# Altium PCB PCB1.PcbDoc
Units mil, origin at the board's own origin, x right, y up, seen from the top; angles counter-clockwise.
Board outline 6000 x 4000 mil, 2 copper layers (Top Layer, Bottom Layer); 27 components, 52 nets, 173 pads, 6 vias.
Unrouted connection lines stored in the file: 77.
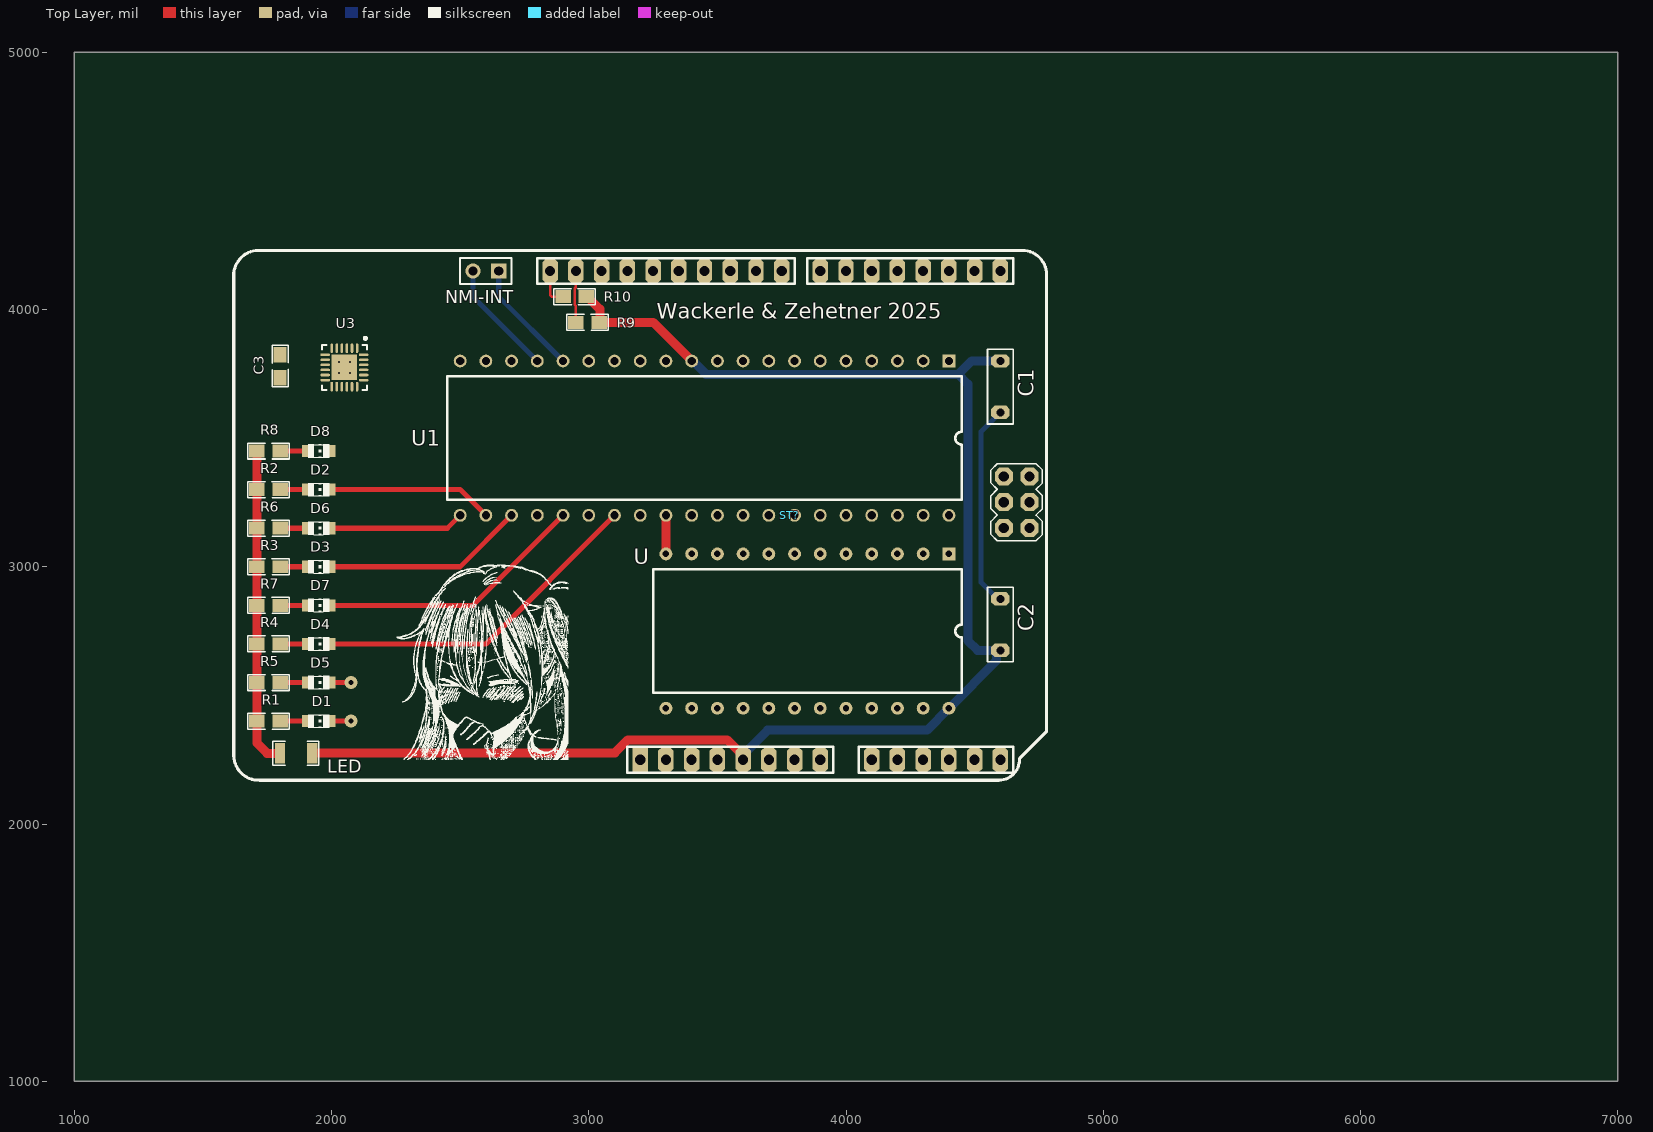
[diagram p0: Top Layer view]
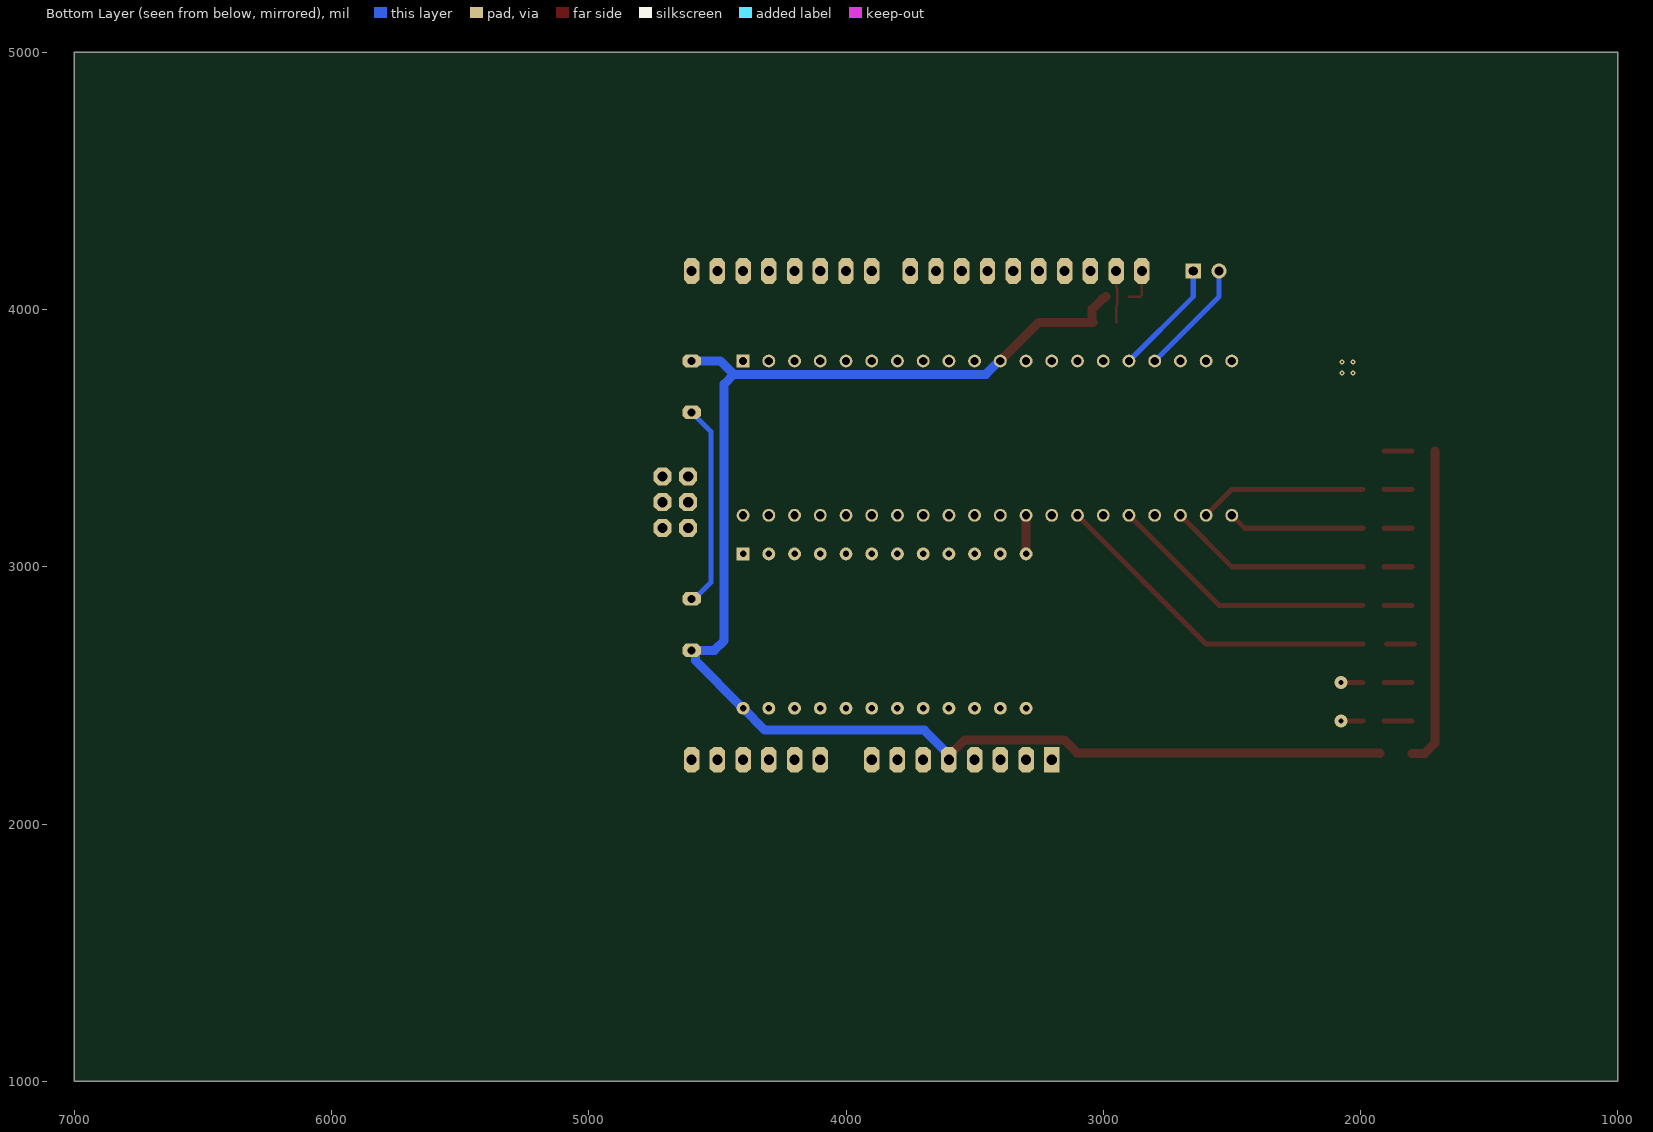
[diagram p1: Bottom Layer view, seen from below]

## Layer stack, top to bottom
Top Solder: solder mask 0.4, Solder Resist, Dk 3.5
Top Layer: signal copper 1.4
Dielectric 1: dielectric 12.6, FR-4, Dk 4.8
Bottom Layer: signal copper 1.4
Bottom Solder: solder mask 0.4, Solder Resist, Dk 3.5

## Board outline
1000,1000 7000,1000 7000,5000 1000,5000

## Design rules (kind name [scope] priority, off if disabled: settings)
Clearance [All] p1: gap=10 ignorepadtopadclearanceinfootprint=FALSE
PolygonConnect [All] p1: connectstyle=Relief reliefconductorwidth=10 reliefentries=4 polygonreliefangle="90 Angle" airgapwidth=10
RoutingVias [All] p1: holewidth=28 width=50 viastyle="Through Hole" minholewidth=28 minwidth=50 maxholewidth=28 maxwidth=50
SolderMaskExpansion [All] p1: expansion=4 istentingtop=FALSE
SupplyNets "Schematic Supply Nets_16" [InNet('SCL')] p1: voltage=0.000
SupplyNets "Schematic Supply Nets_15" [InNet('/HALT')] p2: voltage=0.000
SupplyNets "Schematic Supply Nets_14" [InNet('/CS_RAM')] p3: voltage=0.000
SupplyNets "Schematic Supply Nets_13" [InNet('SDA')] p4: voltage=0.000
SupplyNets "Schematic Supply Nets_12" [InNet('/BUSRQ')] p5: voltage=0.000
SupplyNets "Schematic Supply Nets_11" [InNet('/Read')] p6: voltage=0.000
SupplyNets "Schematic Supply Nets_10" [InNet('5V')] p7: voltage=0.000
SupplyNets "Schematic Supply Nets_9" [InNet('Clock')] p8: voltage=0.000
SupplyNets "Schematic Supply Nets_8" [InNet('/WAIT')] p9: voltage=0.000
SupplyNets "Schematic Supply Nets_7" [InNet('/Write')] p10: voltage=0.000
SupplyNets "Schematic Supply Nets_6" [InNet('/MREQ')] p11: voltage=0.000
SupplyNets "Schematic Supply Nets_5" [InNet('/Reset_Z80')] p12: voltage=0.000
SupplyNets "Schematic Supply Nets_4" [InNet('LED_5V')] p13: voltage=0.000
SupplyNets "Schematic Supply Nets_3" [InNet('/IOREQ')] p14: voltage=0.000
SupplyNets "Schematic Supply Nets_2" [InNet('GND')] p15: voltage=0.000
SupplyNets "Schematic Supply Nets_1" [InNet('/M1')] p16: voltage=0.000
SupplyNets "Schematic Supply Nets" [InNet('/BUSACK')] p17: voltage=0.000
Width [All] p1: maxlimit=100 minlimit=10 preferedwidth=25 minimp=50.000000 maximp=50.000000 favimp=50.000000
30 further rules are at their usual default settings.

## Components (designator, comment, footprint, x,y, rotation, side; value= is the part's Value field where it differs from the comment)
C1 "100nF" C_RM2-025X075 4600,3600 r90 top
C2 "100nF" C_RM2-025X075 4600,2875 r270 top
C3 "100nF" C_SMD_C0805 1800,3735 r90 top
D1 "SMD LED RED" "SMD_0805_CHIP-LED - RED" 1950,2400 r270 top
D2 "SMD LED RED" "SMD_0805_CHIP-LED - RED" 1950,3300 r270 top
D3 "SMD LED GREEN" "SMD_0805_CHIP-LED - GREEN" 1950,3000 r270 top
D4 "SMD LED YELLOW" "SMD_0805_CHIP-LED - YELLOW" 1950,2700 r270 top
D5 "SMD LED RED" "SMD_0805_CHIP-LED - RED" 1950,2550 r270 top
D6 "SMD LED RED" "SMD_0805_CHIP-LED - RED" 1950,3150 r270 top
D7 "SMD LED GREEN" "SMD_0805_CHIP-LED - GREEN" 1950,2850 r270 top
D8 "SMD LED YELLOW" "SMD_0805_CHIP-LED - YELLOW" 1950,3450 r270 top
LED "0R" R_SMD_R1206 1925,2275 r180 top
NMI-INT "Header 2" HDR1X2 2650,4150 r180 top
R1 "200R" R_SMD_R0805 1800,2400 r180 top
R2 "200R" R_SMD_R0805 1800,3300 r180 top
R3 "160R" R_SMD_R0805 1800,3000 r180 top
R4 "160R" R_SMD_R0805 1800,2700 r180 top
R5 "200R" R_SMD_R0805 1800,2550 r180 top
R6 "200R" R_SMD_R0805 1800,3150 r180 top
R7 "160R" R_SMD_R0805 1800,2850 r180 top
R8 "160R" R_SMD_R0805 1800,3450 r180 top
R9 "4k7" R_SMD_R0805 3040,3950 r180 top
R10 "4k7" R_SMD_R0805 2990,4050 r180 top
ST? "Arduino_UNO_R3_Layout" "Arduino UNO Rev3 Layout" 3400,2250 r0 top locked
U "HM6116L" HM6116L 4400,3050 r270 top
U1 "Zilog Z80" Z80 4400,3800 r270 top
U3 "MCP23018" MCP23018 2050,3775 r270 top

## Footprints (in the part's own frame and the unit in brackets; to place one, negate y for a bottom-side part, rotate by r counter-clockwise, add the part's x,y. Pads: shape width x height; smd on the part's side, far side on the other; paste and mask are expansions set on the pad)
"Arduino UNO Rev3 Layout" [mil] "Arduino UNO Rev3 Headers"
  oct 60x100 hole 39.37: 5V(200,0) 33V(100,0) A0(700,0) A1(800,0) A2(900,0) A3(1000,0) A4(1100,0) A5(1200,0) AREF(-350,1900) D0_RX(1200,1900) D1_TX(1100,1900) D2(1000,1900) D3(900,1900) D4(800,1900) D5(700,1900) D6(600,1900) D7(500,1900) D8(350,1900) D9(250,1900) D10(150,1900) D11_MOSI(50,1900) D12_MISO(-50,1900) D13_SCK(-150,1900) GND(-250,1900) GND(300,0) GND(400,0) RESET(0,0) SCL(-550,1900) SDA(-450,1900) VDDIO(-100,0) VIN(500,0)
  oct 70x70 hole 39.37: 5V(1313.41,1100.89) D11_MOSI(1313.41,1000.89) D12_MISO(1213.41,1100.89) D13_SCK(1213.41,1000.89) GND(1313.41,900.89) RESET(1213.41,900.89)
  rect 60x100 hole 39.37: N.C.(-200,0)
  silkscreen extent -1780,-80 1380,1980, body extent -600,-50 1250,1950, height 335
C_RM2-025X075 [mil] "RM2, outline 2.5 x 7.5 mm"
  oct 52x72 hole 31.5: 1(0,0) 2(200,0)
  silkscreen extent -45,-50 245,50
C_SMD_C0805 [mil] "SMD, 0805"
  rect 60x50 smd: 1(0,0) 2(90,0)
  silkscreen extent -36,-31 126,31, body extent 6,-25 84,25, height 31
HDR1X2 [mm] "Connector; Header; 2 Position"
  rect 1.5x1.5 hole 0.9: 1(0,0)
  round 1.5 hole 0.9: 2(2.54,0)
  silkscreen extent -1.27,-1.27 3.81,1.27
HM6116L [mil]
  rect 50x50 hole 25: 1(0,0)
  round 50 hole 25: 2(0,-100) 3(0,-200) 4(0,-300) 5(0,-400) 6(0,-500) 7(0,-600) 8(0,-700) 9(0,-800) 10(0,-900) 11(0,-1000) 12(0,-1100) 13(600,-1100) 14(600,-1000) 15(600,-900) 16(600,-800) 17(600,-700) 18(600,-600) 19(600,-500) 20(600,-400) 21(600,-300) 22(600,-200) 23(600,-100) 24(600,0)
  silkscreen extent 60,-1150 540,50
MCP23018 [mm] "16bit I2C Port expander"
  oval 0.95x0.25 smd: 1(-1.9,1.25) 2(-1.9,0.75) 3(-1.9,0.25) 4(-1.9,-0.25) 5(-1.9,-0.75) 6(-1.9,-1.25) 13(1.9,-1.25) 14(1.9,-0.75) 15(1.9,-0.25) 16(1.9,0.25) 17(1.9,0.75) 18(1.9,1.25)
  oval 0.25x0.95 smd: 7(-1.25,-1.9) 8(-0.75,-1.9) 9(-0.25,-1.9) 10(0.25,-1.9) 11(0.75,-1.9) 12(1.25,-1.9) 19(1.25,1.9) 20(0.75,1.9) 21(0.25,1.9) 22(-0.25,1.9) 23(-0.75,1.9) 24(-1.25,1.9)
  rect 2.5x2.5 smd: 25(0,0)
  silkscreen extent -3,-2.23 2.23,2.22, body extent -2.07,-2.08 2.08,2.07, height 0.8
R_SMD_R0805 [mil] "SMD, 0805"
  rect 60x50 smd: 1(0,0) 2(90,0)
  silkscreen extent -36,-31 126,31, body extent 4,-25 82,25, height 31
R_SMD_R1206 [mm] "SMD, 1206"
  rect 1x2 smd: 1(0,0) 2(3.2,0)
  silkscreen extent -0.66,-1.17 3.89,1.17, body extent 0,-0.8 3.2,0.8, height 1
"SMD_0805_CHIP-LED - GREEN" [mm]
  rect 1.2x1.2 smd: A(0,-1.05) K(0,1.05)
  silkscreen extent -0.68,-1.05 0.68,1.05, body extent -0.63,-1.01 0.62,1.01, height 1.1
"SMD_0805_CHIP-LED - RED" [mm]
  rect 1.2x1.2 smd: A(0,-1.05) K(0,1.05)
  silkscreen extent -0.68,-1.05 0.68,1.05, body extent -0.68,-1.05 0.67,1.05, height 0.9
"SMD_0805_CHIP-LED - YELLOW" [mm]
  rect 1.2x1.2 smd: A(0,-1.05) K(0,1.05)
  silkscreen extent -0.68,-1.05 0.68,1.05, body extent -0.63,-1.01 0.62,1.01, height 1.1
Z80 [mil]
  rect 50x50 hole 32: 1(0,0)
  round 50 hole 32: 2(0,-100) 3(0,-200) 4(0,-300) 5(0,-400) 6(0,-500) 7(0,-600) 8(0,-700) 9(0,-800) 10(0,-900) 11(0,-1000) 12(0,-1100) 13(0,-1200) 14(0,-1300) 15(0,-1400) 16(0,-1500) 17(0,-1600) 18(0,-1700) 19(0,-1800) 20(0,-1900) 21(600,-1900) 22(600,-1800) 23(600,-1700) 24(600,-1600) 25(600,-1500) 26(600,-1400) 27(600,-1300) 28(600,-1200) 29(600,-1100) 30(600,-1000) 31(600,-900) 32(600,-800) 33(600,-700) 34(600,-600) 35(600,-500) 36(600,-400) 37(600,-300) 38(600,-200) 39(600,-100) 40(600,0)
  silkscreen extent 60,-1950 540,50

## Part data
C1 C2: library part C, "Capacitor", Rated Voltage=50V, LatestRevisionDate=07-Sep-2019, Published=21-Feb-2011, Usage="only permitted for non-commercial purposes at HTL I Innsbruck"
C3: library part C_SMD, "SMD Capacitor", Rated Voltage=25V, LatestRevisionDate=07-Sep-2019, Published=21-Feb-2011, Usage="only permitted for non-commercial purposes at HTL I Innsbruck"
D1 D2 D5 D6: library part SMD_LED_RED, "Red GaAs LED (Vf=1.7V, If=40mA)", LatestRevisionDate=21-Jun-2015, Published=29-Mar-2017, SimulationModellSource="Miscellaneous Devices", Usage="only permitted for non-commercial purposes at HTL I Innsbruck"
D3 D7: library part SMD_LED_GREEN, "Green GaAs LED (Vf=2.1V, If=40mA)", LatestRevisionDate=21-Jun-2015, Published=29-Mar-2017, SimulationModellSource="Miscellaneous Devices", Usage="only permitted for non-commercial purposes at HTL I Innsbruck"
D4 D8: library part SMD_LED_YELLOW, "Yellow GaAs LED (Vf=2.1V, If=40mA)", LatestRevisionDate=21-Jun-2015, Published=29-Mar-2017, SimulationModellSource="Miscellaneous Devices", Usage="only permitted for non-commercial purposes at HTL I Innsbruck"
LED R1 R2 R3 R4 R5 R6 R7 R8 R9 R10: library part R_SMD, "SMD Resistor", LatestRevisionDate=07-Sep-2019, Published=21-Feb-2011, Usage="only permitted for non-commercial purposes at HTL I Innsbruck"
NMI-INT: "Header, 2-Pin", LatestRevisionDate=17-Jul-2002, LatestRevisionNote="Re-released for DXP Platform.", Publisher="Altium Limited"
ST?: "Arduino UNO r3 Layout", LatestRevisionDate=10-Mar-2015, Published=10-Mar-2015, Publisher="Michael Kupfner", Usage="only permitted for non-commercial purposes at HTL I Innsbruck"
U: "2kbyte SRAM"
U1: "https://www.zilog.com/docs/z80/um0080.pdf"

## Via types
v1: diameter 19.68, hole 7.87, Top Layer to Bottom Layer, 4 vias
v2: diameter 50, hole 20, Top Layer to Bottom Layer, 2 vias

## Nets (pads, with @x,y where several pads share a name; then routed paths per layer and width w, separated by ;. In a path a pad name is that pad's centre, name@x,y a point inside that pad or via, vN(x,y) a via of type N, cw(c..) or ccw(c..) an arc to the next point about the centre after c; other vN are vias at no path point)
5V: C1.2 C2.2 C3.2 LED.1 R9.1 R10.1 ST?.5V U1.11 U3.8 U.24 | length 5918.5
  Top Layer w35: LED.1 1926.68,2276.68 3101.68,2276.68 3152.5,2327.5 3538.25,2327.5 3600,2265.75 ST?.5V@3600,2250 ; R10.1 2997.5,4042.5 3002.5,4042.5 3043,4002 3043,3953 R9.1 3250,3950 U1.11
  Bottom Layer w35: U1.11 3404.06,3800 3456.56,3747.5 4436.39,3747.5 ; ST?.5V@3600,2250 3600,2270 3695.13,2365.13 4315.13,2365.13 U.24 ; U.24@4402.5,2452.5 4585.88,2635.88 4585.88,2666.5 C2.2@4594.38,2675 ; C2.2 C2.2@4594.38,2675 ; C1.2 4488.89,3800 4436.39,3747.5 ; 4436.39,3747.5 4473.95,3709.95 4473.95,2712.55 4511.5,2675 C2.2@4594.38,2675
/BUSACK: D3.K ST?.A1 U1.23 | length 791.5
  Top Layer w20: D3.K 2500,3000 U1.23
/BUSRQ: D7.K ST?.A0 U1.25 | length 1053.6
  Top Layer w20: D7.K 2550,2850 U1.25
/CS_RAM: ST?.A4 U.18
/HALT: ST?.A5 U1.18
/IOREQ: D1.K ST?.D10 U1.20 | length 83.7
  Top Layer w20: D1.K v2(2075,2400)
/M1: D4.K ST?.D13_SCK U1.27 | length 1315.8
  Top Layer w20: D4.K 2600,2700 U1.27
/MREQ: D5.K ST?.D11_MOSI U1.19 | length 83.7
  Top Layer w20: D5.K v2(2075,2550)
/Read: D6.K ST?.D8 U1.21 U.20 | length 529.4
  Top Layer w20: D6.K 2450,3150 U1.21
/Reset_Z80: ST?.A3 U1.26
/WAIT: ST?.D12_MISO U1.24
/Write: D2.K ST?.D9 U1.22 U.21 | length 650.1
  Top Layer w20: D2.K 2500,3300 U1.22
A0: U1.30 U3.15 U.8
A1: U1.31 U3.16 U.7
A2: U1.32 U3.17 U.6
A3: U1.33 U3.18 U.5
A4: U1.34 U3.19 U.4
A5: U1.35 U3.20 U.3
A6: U1.36 U3.21 U.2
A7: U1.37 U3.22 U.1
A8: U1.38 U3.1 U.23
A9: U1.39 U3.2 U.22
A10: U1.40 U3.3 U.19
A11: U1.1 U3.4
A12: U1.2 U3.5
A13: U1.3 U3.6
A14: U1.4 U3.7
A15: U1.5
Clock: D8.K ST?.A2 U1.6
D0: ST?.D0_RX U1.14 U.17
D1: ST?.D1_TX U1.15 U.16
D2: ST?.D2 U1.12 U.15
D3: ST?.D3 U1.8 U.14
D4: ST?.D4 U1.7 U.13
D5: ST?.D5 U1.9 U.11
D6: ST?.D6 U1.10 U.10
D7: ST?.D7 U1.13 U.9
GND: C1.1 C2.1 C3.1 ST?.GND U1.29 U3.11 U3.23 U.12 | length 944.7
  Top Layer w35: U.12 U1.29
  Bottom Layer w20: C2.1 4590,2875 4525,2940 4525,3525 4581.14,3581.14 4581.14,3584 4597.14,3600 C1.1
LED_5V: LED.2 R1.2 R2.2 R3.2 R4.2 R5.2 R6.2 R7.2 R8.2 | length 1240.6
  Top Layer w35: R8.2 R3.2 R7.2 R1.2 1710,2315 1750,2275 LED.2
NetD1_A: D1.A R1.1 | length 108.7
  Top Layer w20: R1.1 D1.A
NetD2_A: D2.A R2.1 | length 108.7
  Top Layer w20: R2.1 D2.A
NetD3_A: D3.A R3.1 | length 108.7
  Top Layer w20: R3.1 D3.A
NetD4_A: D4.A R4.1 | length 108.7
  Top Layer w20: R4.1@1790,2700 D4.A@1898.66,2700
NetD5_A: D5.A R5.1 | length 108.7
  Top Layer w20: R5.1 D5.A
NetD6_A: D6.A R6.1 | length 108.7
  Top Layer w20: R6.1 D6.A
NetD7_A: D7.A R7.1 | length 108.7
  Top Layer w20: R7.1 D7.A
NetD8_A: D8.A R8.1 | length 108.7
  Top Layer w20: R8.1 D8.A
NetNMI-INT_1: NMI-INT.1 U1.16 | length 453.6
  Bottom Layer w20: NMI-INT.1 2650,4050 U1.16
NetNMI-INT_2: NMI-INT.2 U1.17 | length 453.6
  Bottom Layer w20: NMI-INT.2 2550,4050 U1.17
Reset_Master: ST?.RESET U3.12
SCL: R10.2 ST?.SCL U3.9 | length 146.6
  Top Layer w10: ST?.SCL 2850,4055.86 2855.86,4050 R10.2
SDA: R9.2 ST?.SDA U3.10 | length 204.1
  Top Layer w10: R9.2 2950,4013.79 2945,4018.79 2945,4081.21 2949.14,4085.36 2949.14,4149.14 ST?.SDA
pads on no net: ST?.33V ST?.AREF ST?.N.C. ST?.VDDIO ST?.VIN U1.28 U3.13 U3.14 U3.24 U3.25
copper on no net:
  other v1: 2028.35,3753.35 2071.65,3753.35 2028.35,3796.65 2071.65,3796.65

## Silkscreen, mask and mechanical layers (free items; w line width, h text height)
Top Overlay:
  drawing of 1844 lines, arcs and shapes, not listed
  text "Wackerle & Zehetner 2025" at 3265,3965 h60